# Altium PCB PCB1.PcbDoc
Units mil, origin at the board's own origin, x right, y up, seen from the top; angles counter-clockwise.
Board outline 2353.92 x 3345.31 mil, 2 copper layers (Top Layer, Bottom Layer); 23 components, 26 nets, 99 pads, 4 vias.
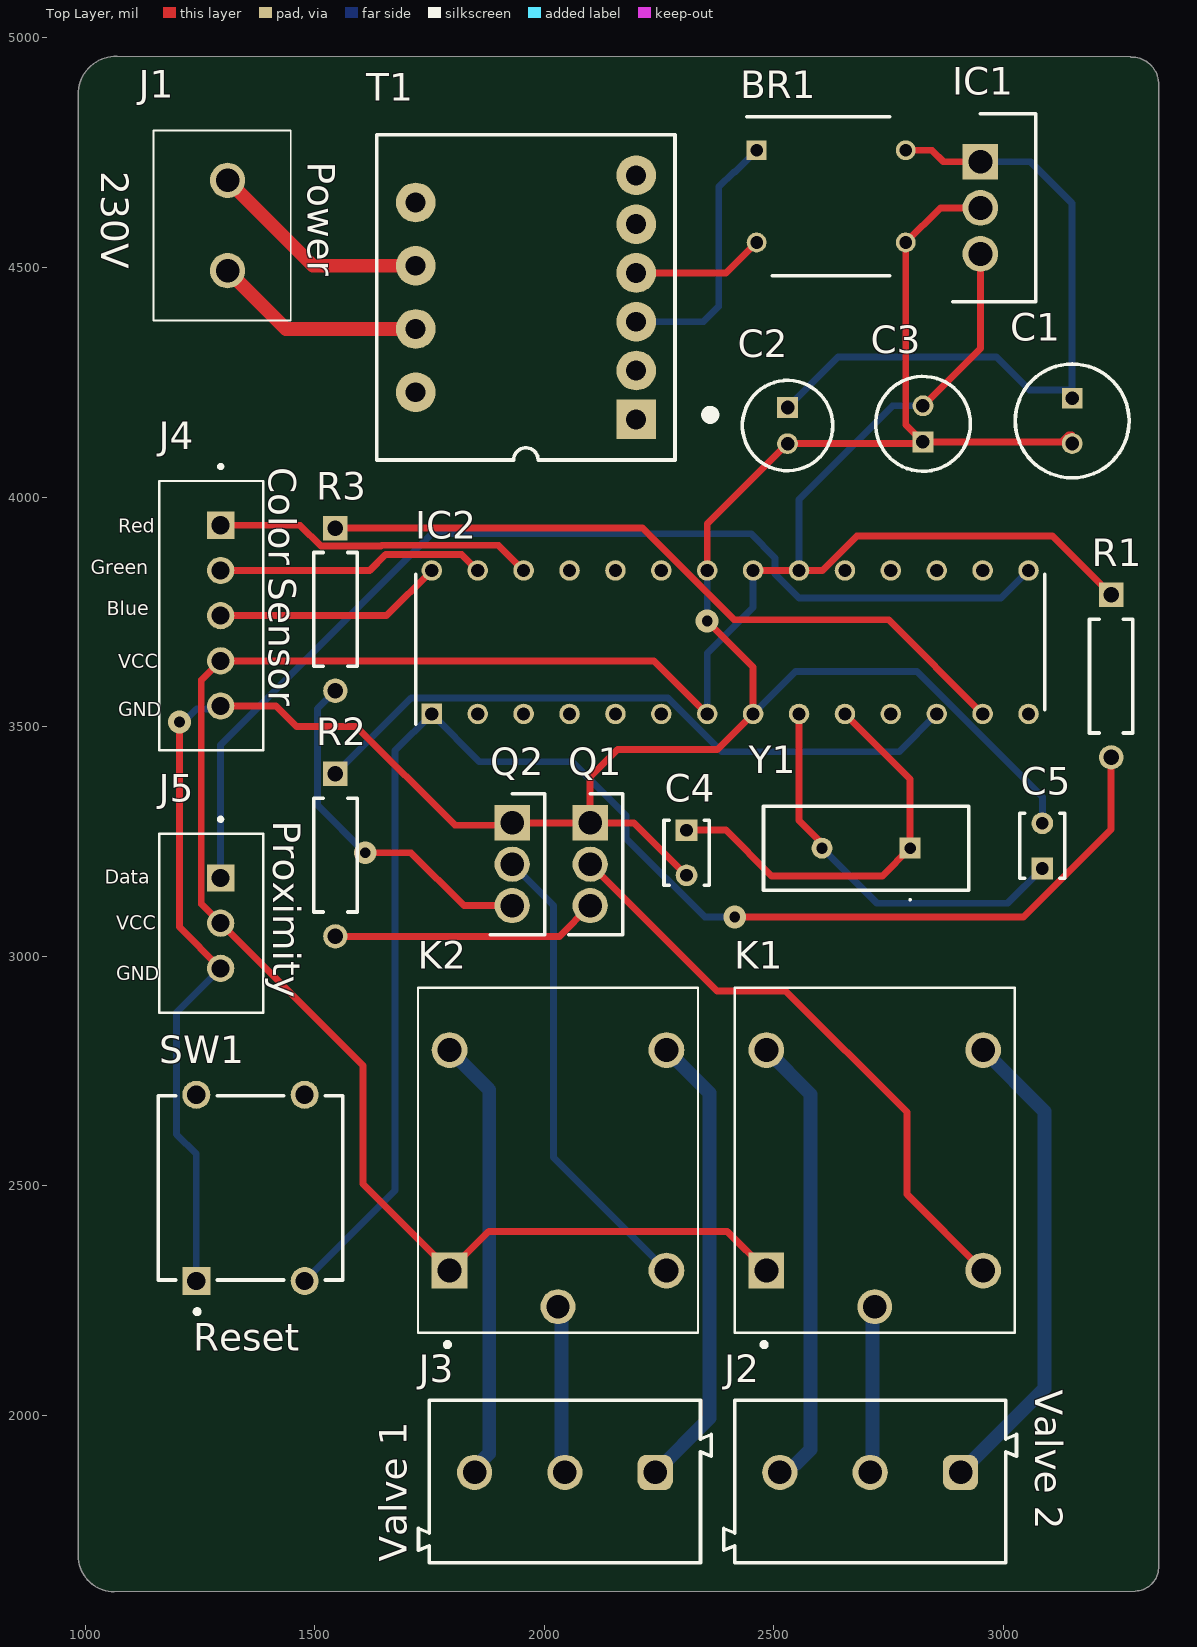
[diagram p0: Top Layer view]
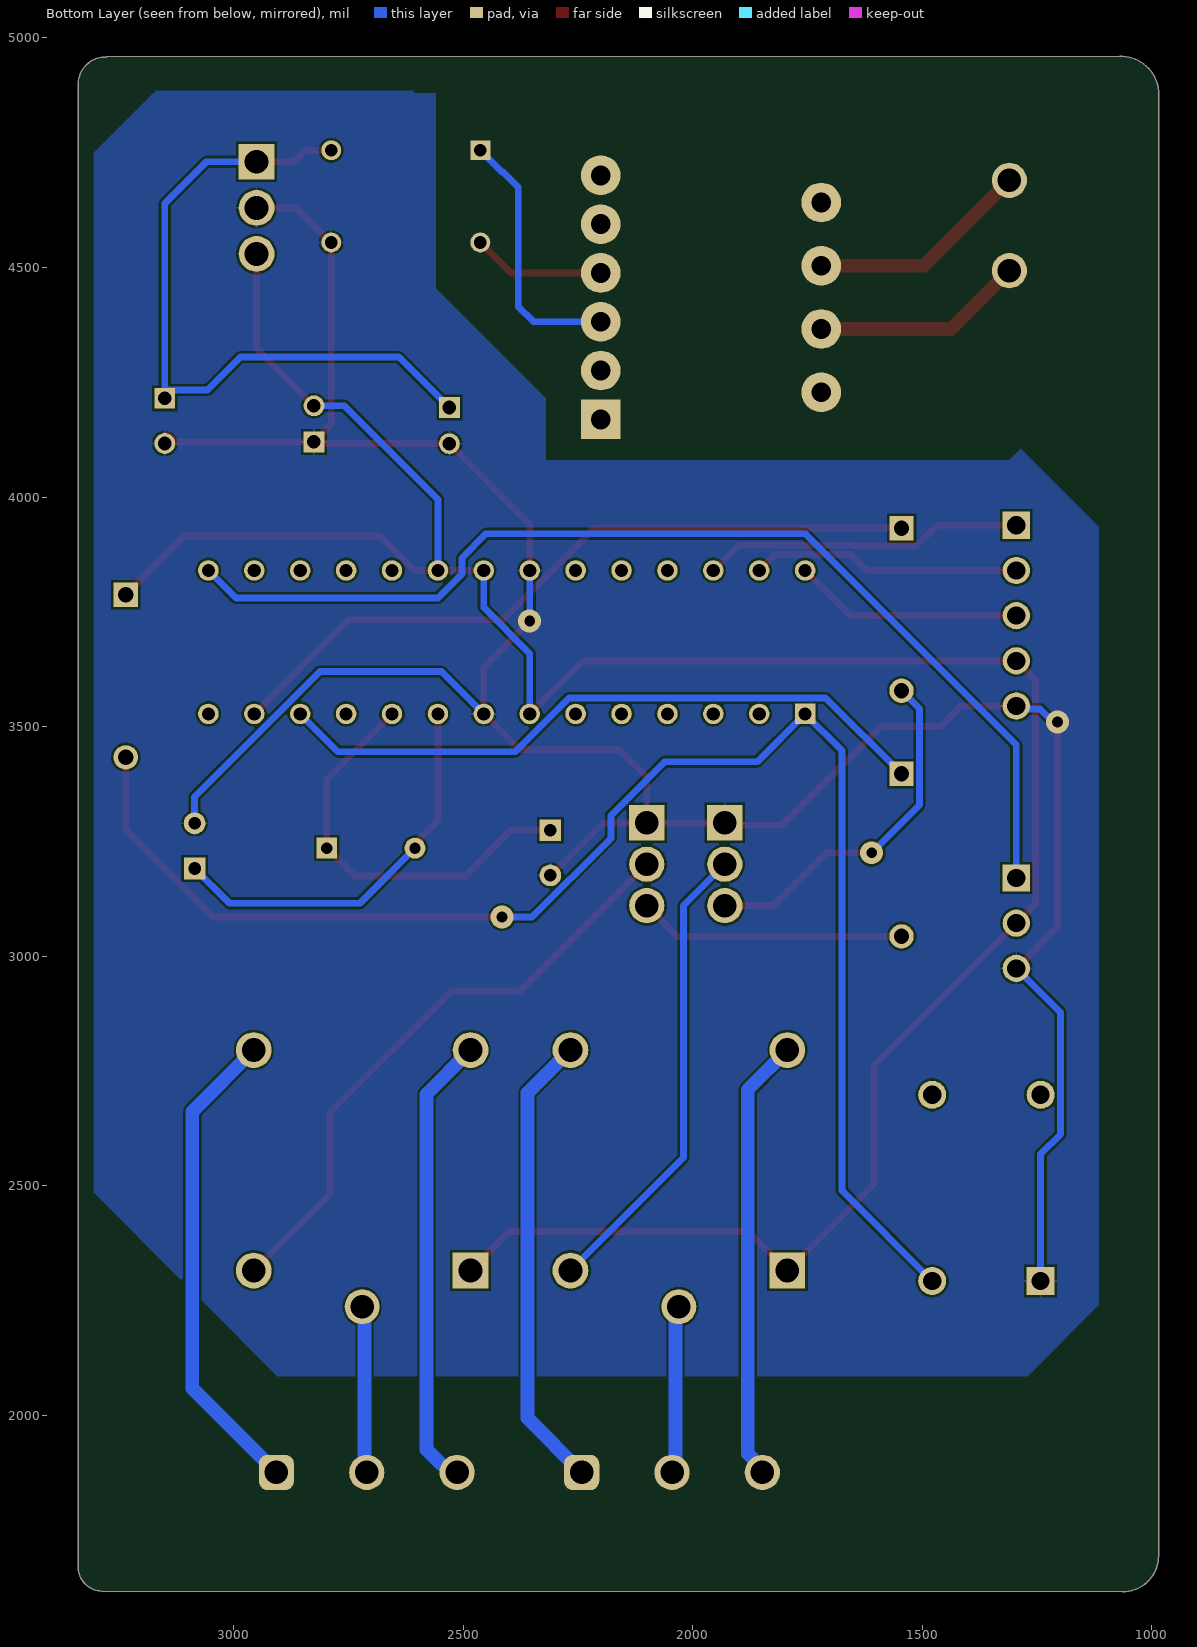
[diagram p1: Bottom Layer view, seen from below]
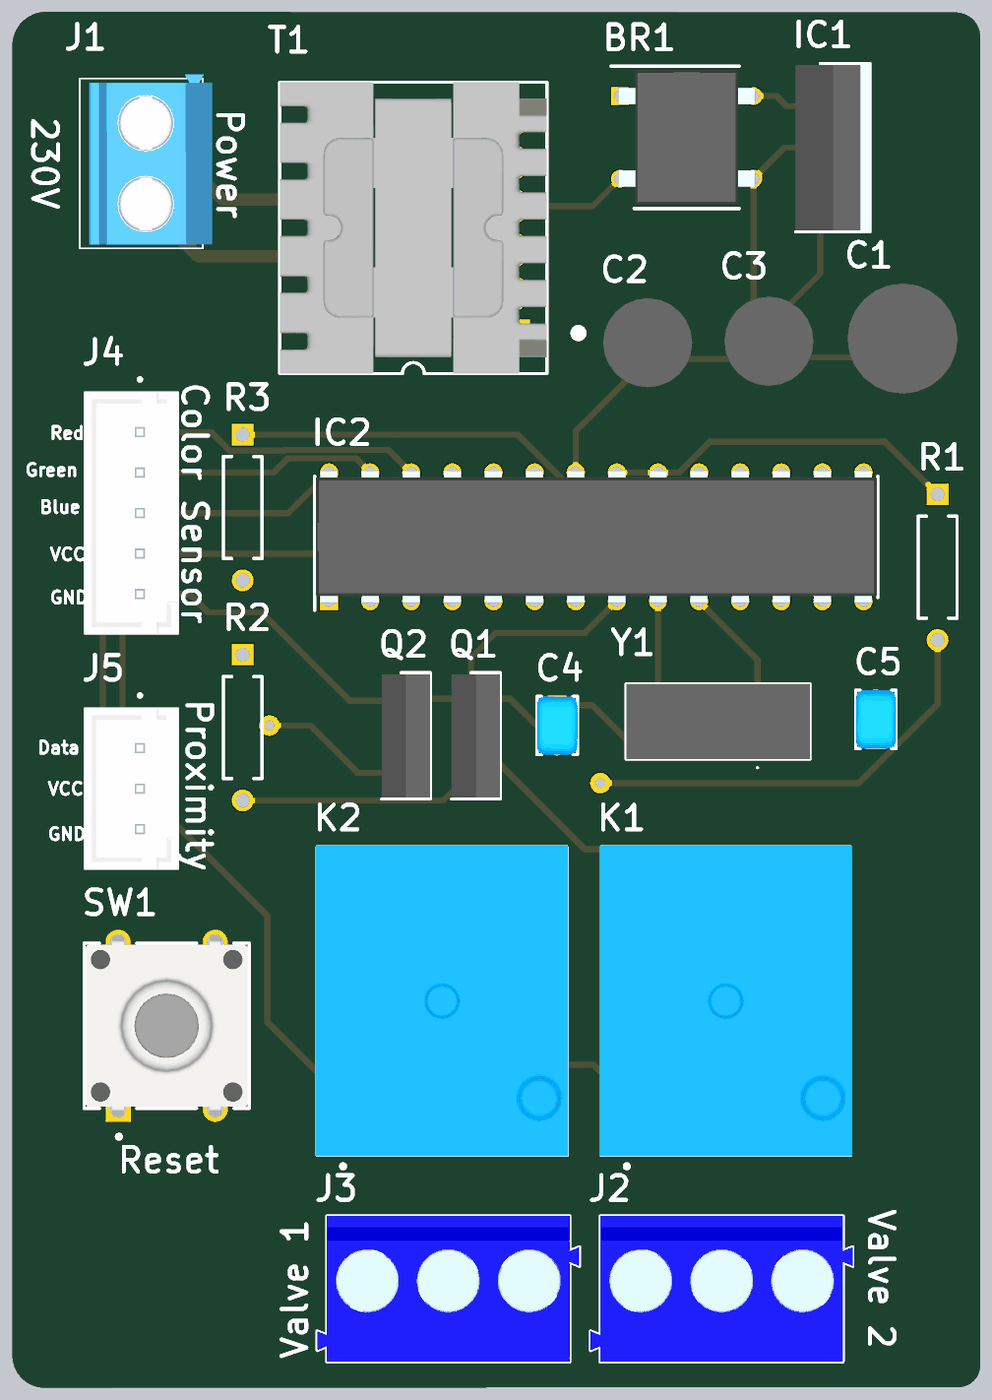
[diagram p2: 3D render of the assembled board from above, using the file's embedded part models]

## Layer stack, top to bottom
Top Solder: solder mask 0.4, Solder Resist, Dk 3.5
Top Layer: signal copper 1.4
Dielectric 1: dielectric 12.6, FR-4, Dk 4.8
Bottom Layer: signal copper 1.4
Bottom Solder: solder mask 0.4, Solder Resist, Dk 3.5

## Board outline
1063.28,1615 cw(c1063.28,1693.28) 985,1693.28 985,4870 cw(c1067.5,4877.5) 1069.74,4960.31 1069.74,4960.02 3277.75,4958.62 3277.75,4958.59 cw(c3279.19,4899.18) 3338.6,4897.74 3338.56,1670.64 cw(c3285.97,1669.05) 3287.56,1616.46

## Design rules (kind name [scope] priority, off if disabled: settings)
BoardOutlineClearance [All] p1: gap=7.87 ignorepadtopadclearanceinfootprint=FALSE
Clearance [All] p1: gap=5 ignorepadtopadclearanceinfootprint=FALSE except(9.84: Arc-Hole Track-Hole SMDPad-Hole THPad-Hole Via-Hole Fill-Hole Poly-Hole Region-Hole Text-Hole)
ComponentClearance [All] p1: gap=5 collisioncheckmode=3 verticalgap=5 showdistances=TRUE
DiffPairsRouting [All] p1: maxlimit=10 minlimit=5 mostfreqgap=5 toplayer_minwidth=5 toplayer_maxwidth=1000 toplayer_prefwidth=5 bottomlayer_minwidth=5 bottomlayer_maxwidth=1000 bottomlayer_prefwidth=5 maxuncoupledlength=500
Height [All] p1: minheight=0 maxheight=71497.94 prefheight=500
HoleSize [All] p1: absolutevalues=TRUE maxlimit=248.03 minlimit=11.81 maxpercent=80.000 minpercent=20.000
HoleToHoleClearance [All] p1: gap=9.84 allowstackedmicrovias=FALSE
MinimumAnnularRing [All] p1: minimumring=3
MinimumSolderMaskSliver [All] p1: minsoldermaskwidth=0
PlaneClearance [All] p1: clearance=5
PlaneConnect PlaneConnectPowerPads [InPadClass('PowerPads')] p1: planeconnectstyle=Direct reliefexpansion=20 reliefentries=4 reliefconductorwidth=10 reliefairgap=10
PlaneConnect [All] p2: pad.planeconnectstyle=Relief pad.reliefexpansion=11.81 pad.reliefentries=4 pad.reliefconductorwidth=5 pad.reliefairgap=5 via.planeconnectstyle=Direct via.reliefexpansion=11.81 via.reliefentries=4 via.reliefconductorwidth=5 via.reliefairgap=5
PolygonConnect PolygonConnectPowerPads [All vs (InPadClass('PowerPads'))] p1: connectstyle=Direct reliefconductorwidth=10 reliefentries=4 polygonreliefangle="90 Angle" airgapwidth=10
PolygonConnect [All] p2: thpad.connectstyle=Relief thpad.reliefconductorwidth=5 thpad.reliefentries=4 thpad.polygonreliefangle="90 Angle" thpad.airgapwidth=5 smdpad.connectstyle=Relief smdpad.reliefconductorwidth=5 smdpad.reliefentries=4 smdpad.polygonreliefangle="90 Angle" smdpad.airgapwidth=5 via.connectstyle=Direct via.reliefconductorwidth=5 via.reliefentries=4 via.polygonreliefangle="90 Angle" via.airgapwidth=5
RoutingVias [All] p1: holewidth=11.81 width=23.62 viastyle="Through Hole" minholewidth=11.81 minwidth=23.62 maxholewidth=23.62 maxwidth=259.84
SilkToSilkClearance [All] p1: silktosilkclearance=0
SilkToSolderMaskClearance [IsPad] p1: minsilkscreentomaskgap=5 clearancetoexposedcopper=TRUE
SolderMaskExpansion [All] p1: expansion=2.95 istentingtop=FALSE
Width [All] p1: maxlimit=1000 minlimit=10 preferedwidth=15 minimp=50.000000 maximp=50.000000 favimp=50.000000
20 further rules are at their usual default settings.

## Components (designator, comment, footprint, x,y, rotation, side; value= is the part's Value field where it differs from the comment)
BR1 "DB107" DIP825W50P510L830H340Q4N 2625,4655 r0 top
C1 "47uf" CAPPRD250W55D630H1220 3150,4215 r270 top
C2 "10uf" CAPPRD200W55D500H1200 2530,4195 r270 top
C3 "ECA-1AM101" CAPPRD200W55D525H1200 2825,4120 r90 top
C4 "22pF" FP-RCE0DB-MFG 2310,3225 r270 top
C5 "22pF" FP-RCE0DB-MFG 3085,3240 r90 top
IC1 "L7805CV-DG" TO255P460X1020X2008-3P 2950,4730.39 r270 top
IC2 "ATMEGA328P-PU" DIP794W53P254L3467H457Q28N 2405,3683.74 r90 top
J1 "POWER IN" TB00250002BE 1310,4493.15 r90 top
J2 "Pneumatic Valve 1" 691101710003 2709.99,1855.31 r180 top
J3 "Pneumatic Valve 2" 691101710003 2044.99,1855.31 r180 top
J4 "RGB Sensor" JST_B5B-XH-A(LF)(SN) 1274.33,3741.57 r90 top
J5 "Proximity" "JST_B3B-XH-A (LF)(SN)" 1274.33,3071.57 r90 top
K1 "SRD-05VDC-SL-C" RELAY_SRD-05VDC-SL-C 2720,2555 r90 top
K2 "SRD-05VDC-SL-C" RELAY_SRD-05VDC-SL-C 2030,2555 r90 top
Q1 "BD139G" TO229P300X760X1364-3P 2100,3290.16 r270 top
Q2 "BD139G" TO229P300X760X1364-3P 1930,3290.16 r270 top
R1 "MFR-25FBF52-10K" RESA60-630X240 3235,3610 r270 top value=10k
R2 "MFR-25FBF52-1K" RESA60-630X240 1545,3220 r270 top value=1k
R3 "MFR-25FBF52-1K" RESA60-630X240 1545,3755 r270 top value=1k
SW1 "RESET" FP-SKQBARA010-MFG 1360,2495 r90 top
T1 "7491182012" "EE16_7_4 (E16)" 1960,4435 r180 top
Y1 "ECS-160-S-4X" ECS160S4X 2797.13,3235 r180 top

## Footprints (in the part's own frame and the unit in brackets; to place one, negate y for a bottom-side part, rotate by r counter-clockwise, add the part's x,y. Pads: shape width x height; smd on the part's side, far side on the other; paste and mask are expansions set on the pad)
691101710003 [mm] "5,00mm - modular - blue - Horizontal entry with pressure clamp - 12,6mm height - 03p"
  rrect50% 1.95x1.95 hole 1.3: 1(-5,-0.5)
  round 1.95 hole 1.3: 2(0,-0.5) 3(5,-0.5)
  silkscreen extent -8.1,-4.5 8.1,4.5, body extent -8.1,-4.5 8.1,4.5, height 12.65
CAPPRD200W55D500H1200 [mm]
  rect 1.15x1.15 hole 0.75: 1(0,0)
  round 1.15 hole 0.75: 2(2,0)
  silkscreen extent -1.5,-2.5 3.5,2.5, body extent -1.75,-2.75 3.75,2.75, height 12
CAPPRD200W55D525H1200 [mm]
  rect 1.15x1.15 hole 0.75: 1(0,0)
  round 1.15 hole 0.75: 2(2,0)
  silkscreen extent -1.62,-2.63 3.62,2.62, body extent -1.75,-2.75 3.75,2.75, height 12
CAPPRD250W55D630H1220 [mm]
  rect 1.15x1.15 hole 0.75: 1(0,0)
  round 1.15 hole 0.75: 2(2.5,0)
  silkscreen extent -1.9,-3.15 4.4,3.15, body extent -2.15,-3.4 4.65,3.4, height 12.2
DIP794W53P254L3467H457Q28N [mil]
  rect 44.61x44.61 hole 28.86: 1(-156.26,650)
  round 44.61 hole 28.86: 2(-156.26,550) 3(-156.26,450) 4(-156.26,350) 5(-156.26,250) 6(-156.26,150) 7(-156.26,50) 8(-156.26,-50) 9(-156.26,-150) 10(-156.26,-250) 11(-156.26,-350) 12(-156.26,-450) 13(-156.26,-550) 14(-156.26,-650) 15(156.26,-650) 16(156.26,-550) 17(156.26,-450) 18(156.26,-350) 19(156.26,-250) 20(156.26,-150) 21(156.26,-50) 22(156.26,50) 23(156.26,150) 24(156.26,250) 25(156.26,350) 26(156.26,450) 27(156.26,550) 28(156.26,650)
  silkscreen extent -179,-685 147,685, body extent -161,-682 161,683, height 180
DIP825W50P510L830H340Q4N [mm]
  rect 1.1x1.1 hole 0.7: 1(-4.125,2.55)
  round 1.1 hole 0.7: 2(-4.125,-2.55) 3(4.125,-2.55) 4(4.125,2.55)
  silkscreen extent -4.67,-4.4 3.25,4.4, body extent -4.25,-4.15 4.25,4.15, height 3.4
ECS160S4X [mm]
  rect 1.155x1.155 hole 0.63: 1(0,0)
  round 1.155 hole 0.63: 2(4.88,0)
  silkscreen extent -3.23,-2.32 8.12,2.9, body extent -3.23,-2.32 8.12,2.32, height 3.6
"EE16_7_4 (E16)" [mm] "THT, 10-Leads, Body 18x16.5mm (max), Pitch 2.7mm"
  rect 2.2x2.2 hole 1.1: 1(-6.1,6.75)
  round 2.2 hole 1.1: 2(-6.1,4.05) 3(-6.1,1.35) 4(-6.1,-1.35) 5(-6.1,-4.05) 6(-6.1,-6.75) 7(6.1,-5.25) 8(6.1,-1.75) 9(6.1,1.75) 10(6.1,5.25)
  silkscreen extent -10.4,-9 8.25,9, body extent -8.25,-9 8.25,9, height 18.2
FP-RCE0DB-MFG [mm]
  rect 1.2x1.2 hole 0.7 paste-1000 mask+0: 1(-1.25,0)
  round 1.2 hole 0.7 paste-1000 mask+0: 2(1.25,0)
  silkscreen extent -1.8,-1.25 1.8,1.25, body extent -1.95,-1.35 1.95,1.35, height 0.25
FP-SKQBARA010-MFG [mm]
  rect 1.55x1.55 hole 1 paste-1000 mask+0: 1(-5.15,3)
  round 1.55 hole 1 paste-1000 mask+0: 2(5.15,3) 3(-5.15,-3) 4(5.15,-3)
  silkscreen extent -6.97,-5.1 5.1,5.1, body extent -6.02,-5.2 6.02,5.2, height 0.25
"JST_B3B-XH-A (LF)(SN)" [mm]
  rect 1.508x1.508 / inner round 1.508 / far side rect 1.508x1.508 hole 1: 1(2.5,-0.525)
  round 1.508 hole 1: 2(0,-0.525) 3(-2.5,-0.525)
  silkscreen extent -4.95,-2.88 5.85,2.88, body extent -4.95,-2.88 4.95,2.88, height 7
JST_B5B-XH-A(LF)(SN) [mm]
  rect 1.508x1.508 / inner round 1.508 / far side rect 1.508x1.508 hole 1: 1(5,-0.525)
  round 1.508 hole 1: 2(2.5,-0.525) 3(0,-0.525) 4(-2.5,-0.525) 5(-5,-0.525)
  silkscreen extent -7.45,-2.88 8.35,2.88, body extent -7.45,-2.88 7.45,2.88, height 7
RELAY_SRD-05VDC-SL-C [mm]
  rect 1.98x1.98 / inner round 1.98 / far side rect 1.98x1.98 hole 1.32: A1(-6.1,6)
  round 1.98 hole 1.32: A2(-6.1,-6) NC(6.1,6) NO(6.1,-6)
  round 1.935 hole 1.29: COM(-8.1,0)
  silkscreen extent -10.3,-7.75 9.55,7.75, body extent -9.6,-7.8 9.6,7.8, height 15.8
RESA60-630X240 [mm] "Axial Resistor, 2-Leads, Dia 2.4mm, Body Length 6.3mm"
  rect 1.35x1.35 hole 0.85: 1(-4.5,0)
  round 1.35 hole 0.85: 2(4.5,0)
  silkscreen extent -3.15,-1.2 3.15,1.2, body extent -4.77,-1.19 4.77,1.2, height 2.4
TB00250002BE [mm]
  round 1.95 hole 1.3: 1(0,0) 2(5,0)
  silkscreen extent -2.75,-3.5 7.75,4.1, body extent -2.51,-4.08 7.99,3.52, height 9.99
TO229P300X760X1364-3P [mm]
  rect 1.95x1.95 hole 1.3: 1(0,0)
  round 1.95 hole 1.3: 2(2.29,0) 3(4.58,0)
  silkscreen extent -1.61,-1.19 6.19,1.81, body extent -1.51,-1.19 6.09,1.81, height 12.76
TO255P460X1020X2008-3P [mm]
  rect 1.98x1.98 hole 1.32: 1(0,0)
  round 1.98 hole 1.32: 2(2.55,0) 3(5.1,0)
  silkscreen extent -2.65,-1.53 7.75,3.07, body extent -2.55,-1.53 7.65,3.07, height 19.21

## Part data
BR1: "Bridge Rectifier", Manufacturer_Name=Rectron, Mouser Part Number=583-DB107, Datasheet Link=https://www.rectron.com/data_sheets/db101-107.pdf, Height=3.4mm, Manufacturer_Part_Number=DB107, Mouser Price/Stock=https://www.mouser.co.uk/ProductDetail/Rectron/DB107?qs=G5AQjGfRJcLGAY%252B6bEDnbw%3D%3D
C1: library part ECE-A1EN470UB, "Capacitor Polarised", Manufacturer_Name=Panasonic, Mouser Part Number=667-ECE-A1EN470UB, Datasheet Link=http://industrial.panasonic.com/cdbs/www-data/pdf/RDF0000/ABA0000C1053.pdf, Height=12.2mm, Manufacturer_Part_Number=ECE-A1EN470UB, Mouser Price/Stock=https://www.mouser.co.uk/ProductDetail/Panasonic/ECE-A1EN470UB?qs=rMMd5vBiahp%252B1Xr0dP1Lmg%3D%3D
C2: library part ECA-1EM100, "Capacitor Polarised", Manufacturer_Name=Panasonic, Mouser Part Number=667-ECA-1EM100, Arrow Part Number=ECA-1EM100, Arrow Price/Stock=https://www.arrow.com/en/products/eca1em100/panasonic, Datasheet Link=https://componentsearchengine.com/Datasheets/2/ECA-1EM100.pdf, Height=12mm, Manufacturer_Part_Number=ECA-1EM100, Mouser Price/Stock=https://www.mouser.com/Search/Refine.aspx?Keyword=667-ECA-1EM100
C3: "Capacitor", Manufacturer_Name=Panasonic, Mouser Part Number=667-ECA-1AM101, Arrow Part Number=ECA-1AM101, Arrow Price/Stock=https://www.arrow.com/en/products/eca-1am101/panasonic?region=nac, Datasheet Link=http://uk.rs-online.com/web/p/products/8073233, Height=12mm, Manufacturer_Part_Number=ECA-1AM101, Mouser Price/Stock=https://www.mouser.co.uk/ProductDetail/Panasonic/ECA-1AM101?qs=o8jAzVTWolupLSuBsMrKhQ%3D%3D
C4 C5: library part CMP-06035-047347-1, "Cap Ceramic 22pF 100V C0G ±5% Radial 2.5mm +125°C Ammo Pack", Case/Package=Radial, Dielectric=C0G, Max Operating Temperature=125°C, Min Operating Temperature=-55°C, Package Quantity=2000, Ratings=AEC-Q200, Resistor Type=Ceramic, Tolerance=5%, Voltage=100V, Capacitance=22pF, Depth=2.5mm, Height=3.5mm, Height - Seated (Max)=0.138inch, Lead Diameter=0.5mm, Lead Pitch=0.098inch, Lead/Base Style=Straight, Length=3.6mm, Mount="Through Hole", Packaging="Tape and Reel", Termination=Radial, Voltage Rating=100V, Voltage Rating (DC)=100V, Width=0.098inch
IC1: "Integrated Circuit", Manufacturer_Name=STMicroelectronics, Mouser Part Number=511-L7805CV-DG, Arrow Part Number=L7805CV-DG, Arrow Price/Stock=https://www.arrow.com/en/products/l7805cv-dg/stmicroelectronics?region=europe, Datasheet Link=http://www.st.com/web/en/resource/technical/document/datasheet/CD00000444.pdf, Height=4.6mm, Manufacturer_Part_Number=L7805CV-DG, Mouser Price/Stock=https://www.mouser.co.uk/ProductDetail/STMicroelectronics/L7805CV-DG?qs=T%2FOtf55vL7c3O0as9P9fAw%3D%3D
IC2: "Integrated Circuit", Manufacturer_Name=Microchip, Mouser Part Number=556-ATMEGA328P-PU, Arrow Part Number=ATMEGA328P-PU, Arrow Price/Stock=https://www.arrow.com/en/products/atmega328p-pu/microchip-technology?region=europe, Datasheet Link=https://www.mouser.ca/datasheet/2/268/ATmega48A_PA_88A_PA_168A_PA_328_P_DS_DS40002061B-3050139.pdf, Height=4.572mm, Manufacturer_Part_Number=ATMEGA328P-PU, Mouser Price/Stock=https://www.mouser.co.uk/ProductDetail/Microchip-Technology/ATMEGA328P-PU?qs=K8BHR703ZXguOQv3sKbWcg%3D%3D
J1: library part TB002-500-02BE, "Connector", Manufacturer_Name="CUI Devices", Mouser Part Number=490-TB002-500-02BE, Arrow Part Number=TB002-500-02BE, Arrow Price/Stock=https://www.arrow.com/en/products/tb002-500-02be/cui-devices?region=nac, Datasheet Link=https://eu.mouser.com/datasheet/2/670/tb002_500-1550579.pdf, Height=10.4mm, Manufacturer_Part_Number=TB002-500-02BE, Mouser Price/Stock=https://www.mouser.co.uk/ProductDetail/CUI-Devices/TB002-500-02BE?qs=vLWxofP3U2x9716kcgva%2Fw%3D%3D
J2 J3: library part CMP-1502-03257-2, Color=Blue, Current=16A, Max Operating Temperature=105°C, Min Operating Temperature=-40°C, Voltage=250V, Contact Material=Brass, Contact Plating=Tin, Current Rating=16A, Height=16.4mm, Housing Material=Nylon, Lead Pitch=5mm, Length=9mm, Mount="Through Hole", NexarPartId=8917705, Number of Contacts=3, Number of Levels=1, Number of Pins=3, Number of Positions Per Level=3, Packaging=Box, Pitch=5.0038mm, Plating=Steel, REACH SVHC=Unknown, RoHS=Compliant, Stripping Length=-7mm, Termination=Screw, Voltage Rating=250V, Width=16.2mm, Wire Gauge (Max)=26AWG, Wire Gauge (Min)=14AWG, Wire/Cable Gauge=26AWG
J4: library part B5B-XH-A(LF)(SN), "Connector Header Through Hole 5 position 0.098 (2.50mm)", Package=None, Check_prices=https://www.snapeda.com/parts/B5B-XH-A(LF)(SN)/JST+Sales+America+Inc./view-part/?ref=eda, MF="JST Sales America Inc.", MP=B5B-XH-A(LF)(SN), SnapEDA_Link=https://www.snapeda.com/parts/B5B-XH-A(LF)(SN)/JST+Sales+America+Inc./view-part/?ref=snap
J5: library part B3B-XH-A_(LF)(SN), "Connector Header Through Hole 3 position 0.098 (2.50mm)", Package=None, Check_prices=https://www.snapeda.com/parts/B3B-XH-A%20(LF)(SN)/JST+Sales+America+Inc./view-part/?ref=eda, MF="JST Sales America Inc.", MP="B3B-XH-A (LF)(SN)", SnapEDA_Link=https://www.snapeda.com/parts/B3B-XH-A%20(LF)(SN)/JST+Sales+America+Inc./view-part/?ref=snap
K1 K2: "5V Trigger Relay Module For Arduino And Raspberry Pi 5V Trigger Relay Module For Arduino And Raspberry Pi", Package="NON STANDARD-5 Songle Relay", Availability="Not in stock", Check_prices=https://www.snapeda.com/parts/SRD-05VDC-SL-C/Songle+Relay/view-part/?ref=eda, MF="Songle Relay", MP=SRD-05VDC-SL-C, Price=None, SnapEDA_Link=https://www.snapeda.com/parts/SRD-05VDC-SL-C/Songle+Relay/view-part/?ref=snap
Q1 Q2: "Transistor BJT NPN", Manufacturer_Name=onsemi, Mouser Part Number=863-BD139G, Arrow Part Number=BD139G, Arrow Price/Stock=https://www.arrow.com/en/products/bd139g/on-semiconductor?region=nac, Datasheet Link=http://www.onsemi.com/pub/Collateral/BD135-D.PDF, Height=3mm, Manufacturer_Part_Number=BD139G, Mouser Price/Stock=https://www.mouser.co.uk/ProductDetail/onsemi/BD139G?qs=vNc2DXHODiLIqGggNMT6cg%3D%3D
R1: library part CMP-009-00047-4, "Axial Resistor, 10 KOhm, +/- 1%, 0.25 W, -55 to 155 degC, 2-Pin THD, RoHS, Bulk", Case/Package=Axial, Manufacturer=Yageo, Max Operating Temperature=155°C, Min Operating Temperature=-55°C, Package Description="2-Pin Axial Lead, Dia 2.4 mm, Body Length 6.3 mm", Package Quantity=200, Package Reference=MFR-25, Power=250mW, Tolerance=1%, Voltage Rating=250V, Datasheet URL=http://www.yageo.com/documents/recent/Yageo%20LR_MFR_2013.pdf, Datasheet Version=Apr-13, Manufacturer URL=http://www.yageo.com/, Mounting Technology=TH, Packaging=Bulk, RoHS Compliant=True
R2 R3: library part CMP-009-00048-4, "Axial Resistor, 1 KOhm, +/- 1%, 250 mW, -55 to 155 degC, 2-Pin THD, RoHS, Bulk", Case/Package=Axial, Manufacturer=Yageo, Max Operating Temperature=155°C, Min Operating Temperature=-55°C, Package Description="2-Pin Axial Lead, Dia 2.4 mm, Body Length 6.3 mm", Package Quantity=200, Package Reference=MFR-25, Power=250mW, Tolerance=1%, Voltage Rating=250V, Composition=CarbonFilm, Datasheet URL=http://www.yageo.com/documents/recent/Yageo%20LR_MFR_2013.pdf, Datasheet Version=Apr-13, Manufacturer URL=http://www.yageo.com/, Mounting Technology=TH, Packaging=Bulk, RoHS Compliant=True
SW1: library part CMP-00631-07849992-1, "SKQBARA010 Switch Tactile N.O. SPST Round Button PC Pins 0.05A 12VDC 1.57N Thru-Hole Automotive", Color=Grey, Contact Current Rating=50mA, Contact Resistance=500mΩ, Max Operating Temperature=90°C, Max Voltage Rating (DC)=12V, Min Operating Temperature=-40°C, Operating Force=1.57N, Actuator Length=850µm, Contact Plating=Silver, Current Rating=50mA, Depth=10.3mm, Electrical Life=100kcycles, Height=5mm, Lead Free="Lead Free", Length=10mm, Life (Cycles)=100kcycles, Max Current Rating=50mA, Mount="Through Hole", NexarPartId=7849992, Number of Positions=2, Orientation=Straight, Packaging=Bulk, Radiation Hardening=No, RoHS=Compliant, Schedule B="8536509065, 8536509065", Termination="PC Pins", Throw Configuration=SPST, Voltage Rating (DC)=12V
T1: library part CMP-1471-00001-1, "Off-Line Transformer WE-UNIT , L=0.9mH", Inductance=0.9mH, Input Voltage (AC)=85-265, Manufacturer="Wuerth Elektronik", Output Current (A)=0.6, Output Voltage (DC)=12, ComponentLink1Description="Manufacturer URL", ComponentLink1URL=http://www.we-online.com, ComponentLink2Description=Datasheet, ComponentLink2URL=http://www.we-online.de/katalog/media/pdf/7491182012.pdf, PackageReference="EE16_7_4 (E16)", PartNumber=7491182012, Turns Ratio="\"9.5\",\"1:1\""
Y1: "Crystal or Oscillator", Manufacturer_Name=ECS, Mouser Part Number=520-HCU1600-SX, Arrow Part Number=ECS-160-S-4X, Arrow Price/Stock=https://www.arrow.com/en/products/ecs-160-s-4x/ecs-international?region=nac, Datasheet Link=http://www.ecsxtal.com/store/pdf/hc-49usx.pdf, Height=3.5mm, Manufacturer_Part_Number=ECS-160-S-4X, Mouser Price/Stock=https://www.mouser.co.uk/ProductDetail/ECS/ECS-160-S-4X?qs=CNVyLAqdhH109We7RtSowA%3D%3D

## Via types
v1: diameter 50, hole 23.62, Top Layer to Bottom Layer, 4 vias

## Nets (pads, with @x,y where several pads share a name; then routed paths per layer and width w, separated by ;. In a path a pad name is that pad's centre, name@x,y a point inside that pad or via, vN(x,y) a via of type N, cw(c..) or ccw(c..) an arc to the next point about the centre after c; other vN are vias at no path point)
Blue: IC2.28 J4.3 | length 500.8
  Top Layer w15: J4.3 1656.57,3741.57 IC2.28
Data_proximity: IC2.15 J5.1 | length 2343.9
  Bottom Layer w15: J5.1 1295,3460 1755,3920 2450,3920 2502.5,3867.5 2502.5,3832.5 2555,3780 2995,3780 IC2.15
GND: BR1.3 C1.2 C2.2 C3.1 C4.2 C5.2 IC1.2 IC2.8 IC2.22 J4.5 J5.3 Q1.1 Q2.1 SW1.1 | length 5902.4
  Top Layer w15: v1(1205,3510) 1205,3063.15 J5.3 ; J4.5 1415.28,3544.72 1460,3500 1590,3500 1805,3285 1924.84,3285 Q2.1 Q1.1 ; C4.2 2195.63,3290.16 Q1.1 ; v1(2355,3730) 2455,3630 IC2.8 2377.52,3450 2160,3450 2100,3390 Q1.1 ; IC2.22 IC2.22@2355,3848.01 ; IC2.22@2355,3860 2355,3941.26 C2.2 2821.26,4116.26 C3.1 ; IC1.2 2862.8,4630 BR1.3 2787.4,4157.6 C3.1 ; C1.2@3150,4135 3141.81,4135 3126.81,4120 C3.1
  Bottom Layer w15: v1(1205,3510) 1214.47,3510 1242.81,3538.34 1288.62,3538.34 J4.5 ; SW1.1 1241.89,2568.63 1198.88,2611.64 1198.88,2877.03 J5.3 ; v1(2355,3730) IC2.22 ; IC2.8 2547.52,3620 2811.7,3620 3085,3346.7 C5.2
Green: IC2.27 J4.2 | length 588.8
  Top Layer w15: J4.2 1619.81,3840 1654.61,3874.8 1820.2,3874.8 IC2.27
NetBR1_1: BR1.1 T1.3 | length 569.5
  Bottom Layer w15: T1.3 2346.85,4381.85 2380,4415 2380,4675 2413.12,4708.12 2415.32,4708.12 BR1.1
NetBR1_2: BR1.2 T1.4 | length 290
  Top Layer w15: T1.4 2396.14,4488.15 BR1.2
NetBR1_4: BR1.4 C1.1 C2.1 IC1.1 | length 1512.1
  Top Layer w15: BR1.4 2844.29,4755.39 2869.29,4730.39 IC1.1
  Bottom Layer w15: C2.1@2530.28,4195 2530.28,4195.28 2545.14,4210.14 2545.42,4210.14 2640.28,4305 2985,4305 3056.57,4233.43 3150,4233.43 3150,4640 3059.61,4730.39 IC1.1
NetC4_1: C4.1 IC2.10 Y1.1 | length 904.7
  Top Layer w15: C4.1 2395.79,3274.21 2495.33,3174.67 2736.79,3174.67 Y1.1 2797.13,3385.35 IC2.10
NetC5_1: C5.1 IC2.9 Y1.2 | length 879.5
  Top Layer w15: IC2.9 2555,3295 2599.17,3250.83 2599.17,3249.08 2608.25,3240 2610,3240 Y1.2
  Bottom Layer w15: Y1.2 2725,3115 3009.21,3115 C5.1
NetIC2_1: IC2.1 R1.2 SW1.3 | length 3278.5
  Top Layer w15: v1(2415,3085) 3044.13,3085 3235,3275.87 R1.2
  Bottom Layer w15: SW1.3 1675,2489.13 1675,3447.48 IC2.1 1859.28,3423.2 2061.41,3423.2 2178.22,3306.38 2178.22,3256.48 2349.7,3085 v1(2415,3085)
NetJ1_1: J1.1 T1.9 | length 462.5
  Top Layer w30: J1.1 1437.05,4366.1 T1.9
NetJ1_2: J1.2 T1.8 | length 496.9
  Top Layer w15: J1.2@1300,4690 J1.2
  Top Layer w30: J1.2 1496.1,4503.9 T1.8
NetJ2_1: J2.1 K1.NO | length 1051.4
  Bottom Layer w30: J2.1 3090,2058.15 3090,2661.38 K1.NO
NetJ2_2: J2.2 K1.COM | length 365.2
  Bottom Layer w15: J2.2 J2.2@2715,1880 ; K1.COM@2715,2231.1 K1.COM
  Bottom Layer w30: J2.2@2715,1880 K1.COM@2715,2231.1
NetJ2_3: J2.3 K1.NC | length 997.6
  Bottom Layer w15: J2.3 2529.87,1875 2549.49,1894.63 2549.63,1894.63
  Bottom Layer w30: K1.NC 2580,2698.94 2580,1925 2549.63,1894.63
NetJ3_1: J3.1 K2.NO | length 1007.5
  Bottom Layer w30: J3.1@2241.85,1875.29 2360,1993.44 2360,2701.66 K2.NO@2266.51,2795.16
NetJ3_2: J3.2 K2.COM | length 367.3
  Bottom Layer w30: K2.COM 2037.5,2228.6 2037.5,1882.5 J3.2
NetJ3_3: J3.3 K2.NC | length 969.1
  Bottom Layer w30: K2.NC 1880,2708.94 1880,1915.96 1848.15,1884.11 J3.3
NetK1_A2: K1.A2 Q1.2 | length 1327.7
  Top Layer w15: Q1.2 2375.91,2924.09 2525.91,2924.09 2790,2660 2790,2481.06 K1.A2
NetK2_A2: K2.A2 Q2.2 | length 1034.4
  Top Layer w15: Q2.2@1920,3200 Q2.2
  Bottom Layer w15: Q2.2 2020,3110 2020,2561.06 K2.A2
NetQ1_3: Q1.3 R2.2 | length 582.8
  Top Layer w15: R2.2 2032.99,3042.83 Q1.3
NetQ2_3: Q2.3 R3.2 | length 779.8
  Top Layer w15: v1(1610,3225) 1710,3225 1825.16,3109.84 Q2.3
  Bottom Layer w15: R3.2 1505.93,3538.76 1505.93,3329.07 v1(1610,3225)
Red: IC2.26 J4.1 | length 702.2
  Top Layer w15: J4.1 1467.91,3938.43 1513.25,3893.09 1644.62,3893.09 1646.33,3894.8 1900.2,3894.8 IC2.26
Relay1: IC2.12 R2.1 | length 1461.1
  Bottom Layer w15: R2.1 1710.12,3562.28 2269.42,3562.28 2386.7,3445 2772.52,3445 IC2.12
Relay2: IC2.13 R3.1 | length 1577.6
  Top Layer w15: R3.1 2213.62,3932.17 2413.13,3732.66 2749.83,3732.66 IC2.13
VCC: C3.2 IC1.3 IC2.7 IC2.20 IC2.21 J4.4 J5.2 K1.A1 K2.A1 R1.1 | length 5548.3
  Top Layer w15: IC2.7 2239.33,3643.15 J4.4 1252.81,3600.96 1252.81,3113.76 J5.2 1605,2761.57 1605,2503.62 K2.A1 1878.94,2400 2398.62,2400 K1.A1 ; IC2.21 IC2.20 2605.78,3840 2680.78,3915 3107.17,3915 R1.1 ; C3.2 2950,4323.74 IC1.3
  Bottom Layer w15: IC2.7 2355,3659.05 2455,3759.05 IC2.21 ; IC2.20 2555,3995 2758.74,4198.74 C3.2
pads on no net: IC2.2 IC2.3 IC2.4 IC2.5 IC2.6 IC2.11 IC2.14 IC2.16 IC2.17 IC2.18 IC2.19 IC2.23 IC2.24 IC2.25 SW1.2 SW1.4 T1.1 T1.2 T1.5 T1.6 T1.7 T1.10

## Polygon pours and split planes (outlines as drawn)
GND on Bottom Layer "GND_L02_P000" (solid, pour order 0): 3170,4885 3305,4750 3305,2485 2905,2085 1270,2085 1115,2240 1115,3935 1285,4105 1310,4080 2320,4080 2320,4215 2560,4455 2560,4880 2605,4880 2610,4885

## Silkscreen, mask and mechanical layers (free items; w line width, h text height)
Top Overlay:
  text "Power" at 1485,4730 h60 r270
  text "230V" at 1035,4710 h60 r270
  text "Color Sensor" at 1400,4065 h60 r270
  text "Red" at 1072,3922 h30
  text "Green" at 1012,3832 h30
  text "Blue" at 1047,3742 h30
  text "VCC" at 1072,3627 h30
  text "GND" at 1072,3522 h30
  text "Proximity" at 1409.99,3295 h60 r270
  text "Data" at 1042,3157 h30
  text "VCC" at 1067,3057 h30
  text "GND" at 1067,2947 h30
  text "Reset" at 1235,2140 h60
  text "Valve 2" at 3070,2055 h60 r270
  text "Valve 1" at 1700,1680 h60 r90
Mechanical 1:
  lines w10: 1069.74,4960.02 3277.75,4958.62 cw(c3279.19,4899.18) 3338.6,4897.74 3338.56,1670.64 cw(c3285.97,1669.05) 3287.56,1616.46 1063.28,1615 cw(c1063.28,1693.28) 985,1693.28 985,4870 cw(c1067.5,4877.5) 1069.74,4960.31